# EAGLE board Board (EAGLE 9.7.0)
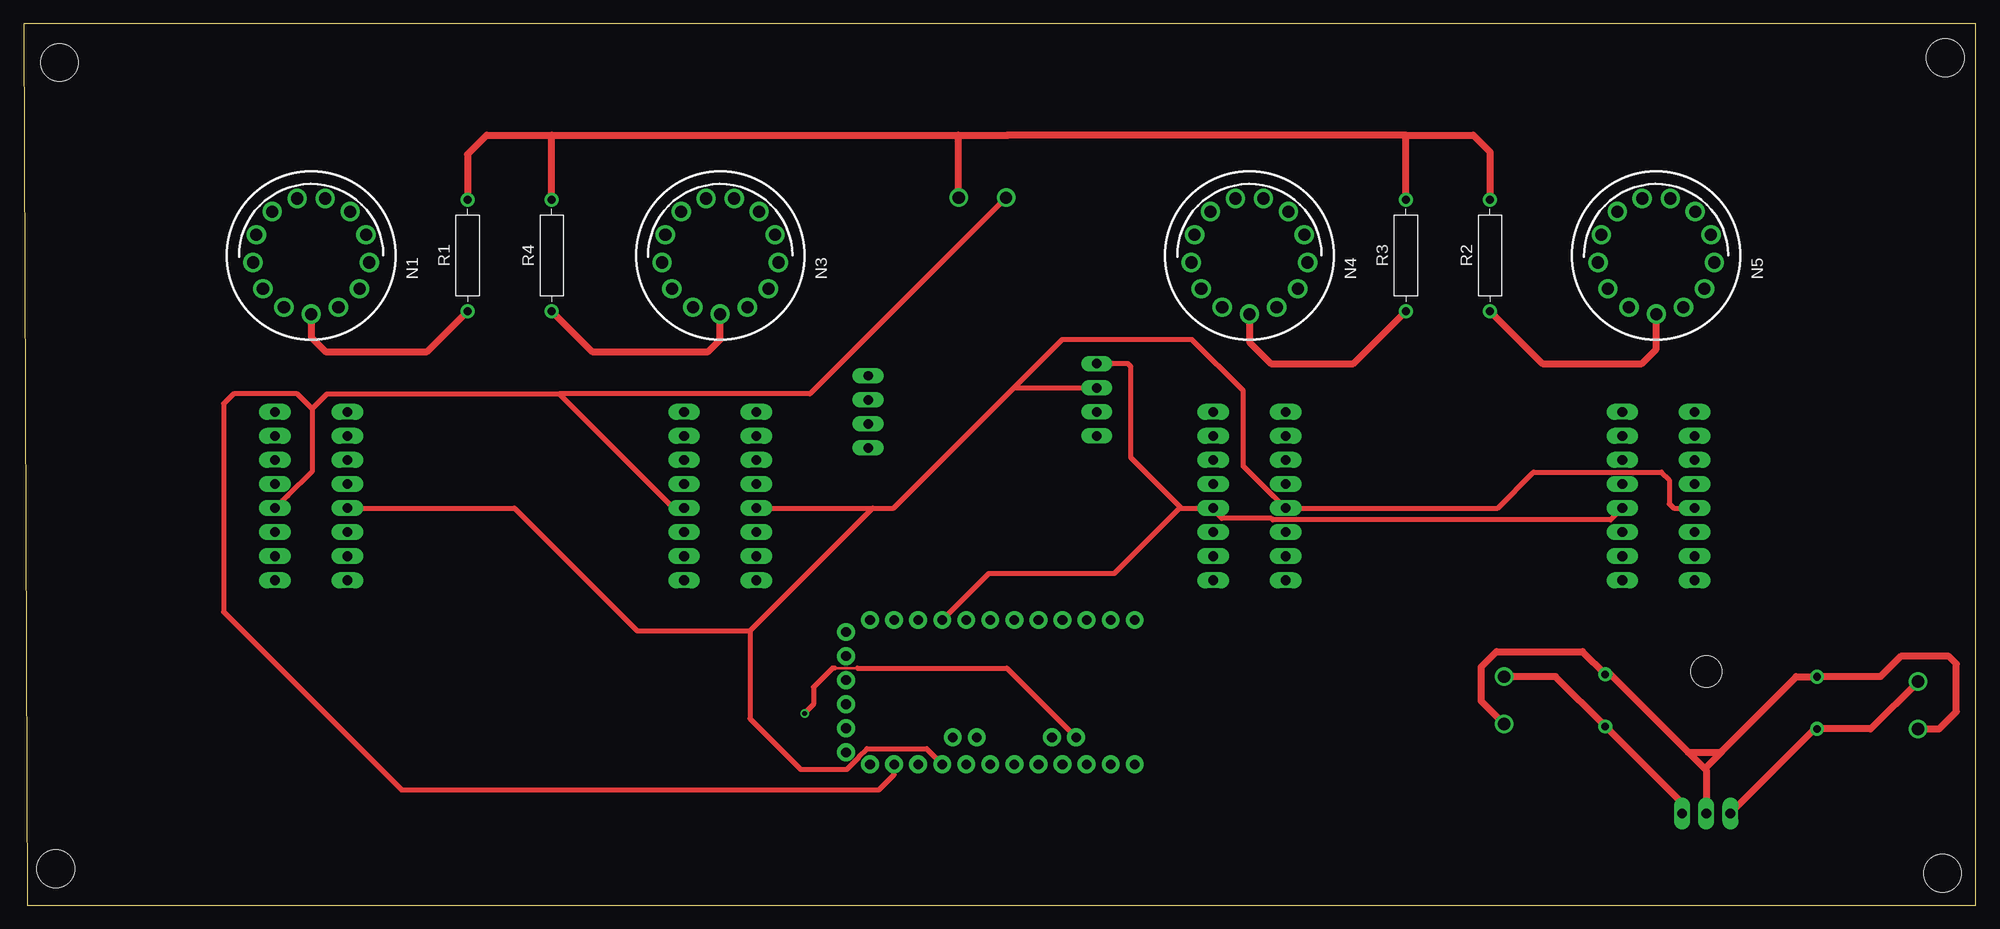
[diagram p0: board, top side]
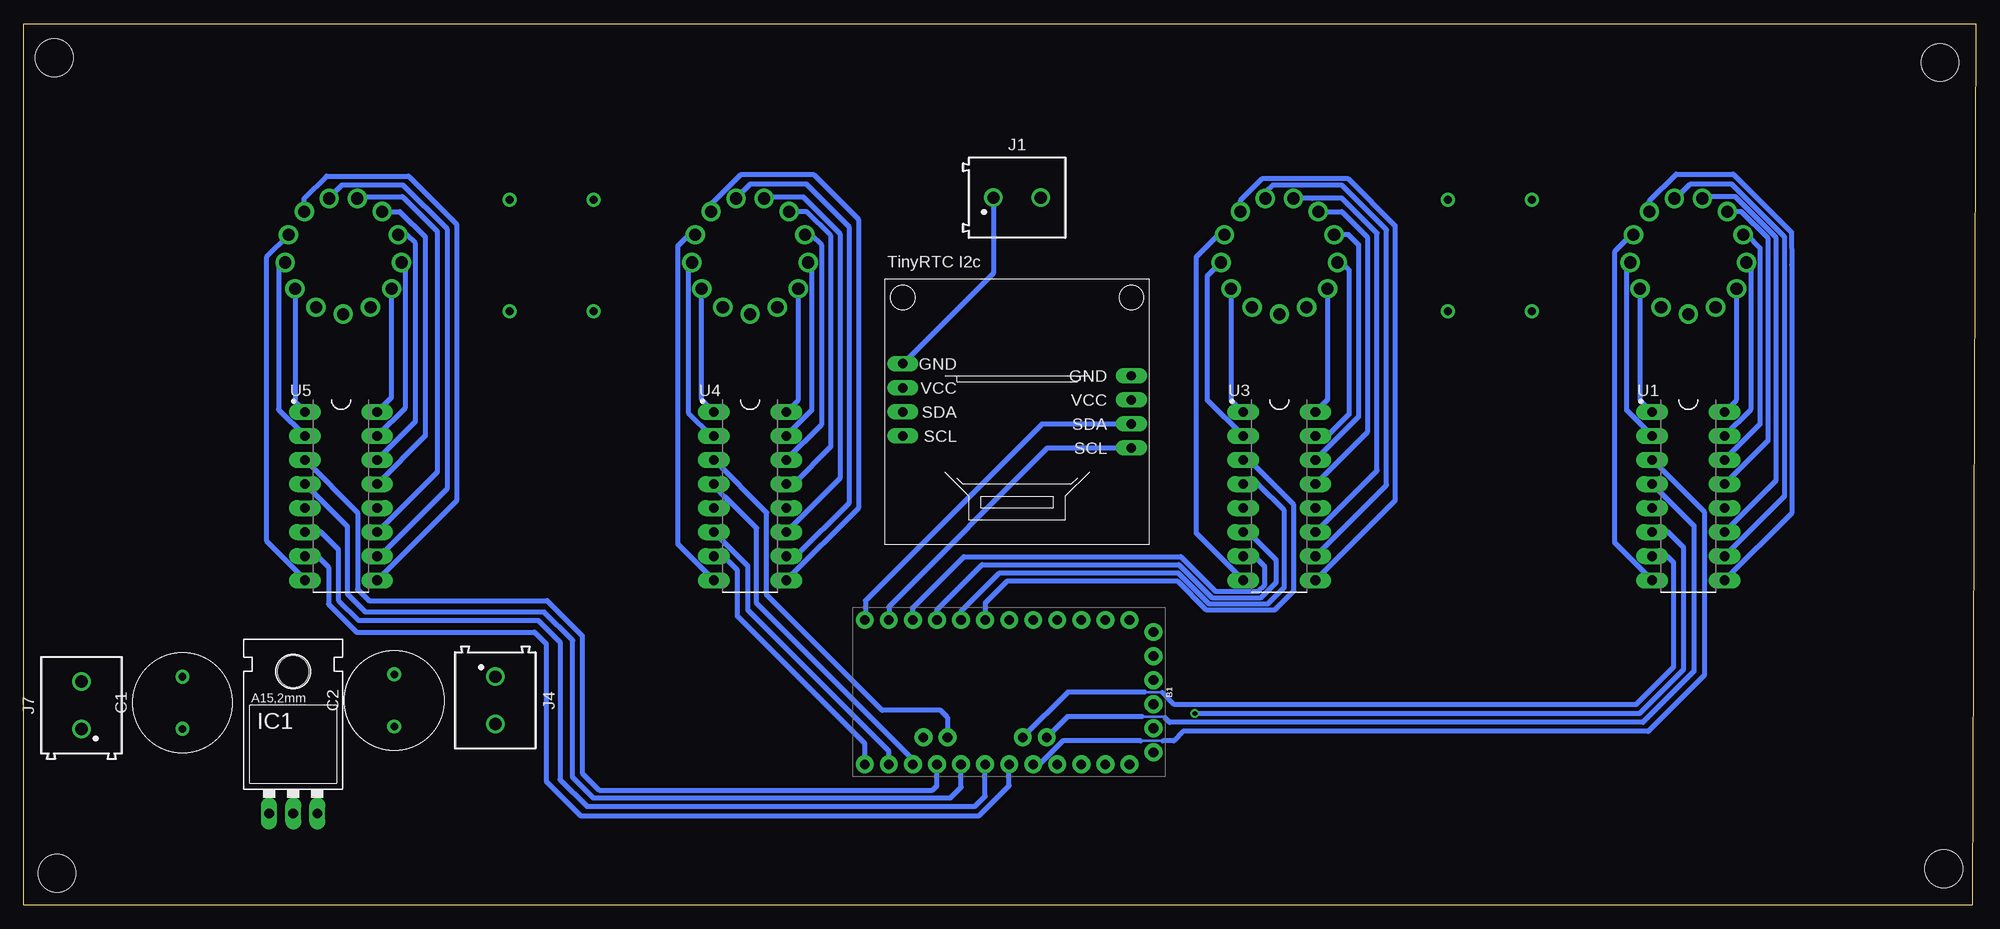
[diagram p1: board, bottom side, seen from below]

Size 206.1 x 93.04 mm. Coordinates in mm from the lower left corner, seen from the top.
Outline: 206.1,0 206.08,93.02 0,93.04 0.38,0 206.1,0
Copper layers (1*16): Top 0.035mm / dielectric 1.5mm / Bottom 0.035mm
Design rules "default *": minimum track width 6mil, minimum drill 0.5mm, track to track 6mil, track to pad 6mil, pad to pad 6mil, via to via 6mil, smd to smd 6mil, copper to edge 40mil, drill to drill 6mil, minimum pad ring 13mil, minimum via ring 8mil, stop-mask expansion 4mil, vias tented up to drill 0mil, thermal gap 10mil
Holes 4 mm at 202.87,89.43 3.78,88.95 3.38,3.84 202.58,3.36

## Footprints (pad centres in the part's own frame; a part is rotated, then mirrored left to right if it is on the bottom)
ARDUINO_PRO_MINI = drill 1.016 pad 1.88: 1 -7.62,12.7; 2 -7.62,10.16; 3 -7.62,7.62; 4 -7.62,5.08; 5 -7.62,2.54; 6 -7.62,0; 7 -7.62,-2.54; 8 -7.62,-5.08; 9 -7.62,-7.62; 10 -7.62,-10.16; 11 -7.62,-12.7; 12 -7.62,-15.24; 13 7.62,-15.24; 14 7.62,-12.7; 15 7.62,-10.16; 16 7.62,-7.62; 17 7.62,-5.08; 18 7.62,-2.54; 19 7.62,0; 20 7.62,2.54; 21 7.62,5.08; 22 7.62,7.62; 23 7.62,10.16; 24 7.62,12.7; A4 4.763,1.429; A5 4.763,3.969; A6 4.763,-9.049; A7 4.763,-6.509; BLK -6.35,15.24; GND -3.81,15.24; GRN 6.35,15.24; RXI 1.27,15.24; TXO 3.81,15.24; VCC -1.27,15.24
CAPRD550W60D1025H1250B = drill 0.8 pad 1.4: 1 -2.75,0; 2 2.75,0
78XXL = drill 1.016 long: GND 0,-3.81; IN -2.54,-3.81; OUT 2.54,-3.81 | hole 3.302: 0,11.176
691213710002 = drill 1.3: 1 -2.5,0; 2 2.5,0
IN-14 = drill 1.27 pad 2.032: 0 5.094,-3.516; 1 -5.094,-3.516; 2 -6.145,-0.746; 3 -5.788,2.195; 4 -4.105,4.633; 5 -1.481,6.01; 6 1.481,6.01; 7 4.105,4.633; 8 5.788,2.195; 9 6.145,-0.746; A 0,-6.19; LHDP 2.877,-5.481; RHDP -2.877,-5.481
RESAD1176W63L850D250B = drill 0.83 pad 1.43: 1 -5.88,0; 2 5.88,0
TINYRTC = drill 1 pad 1.575 long: 1 -12.065,2.54; 2 -12.065,0; 3 -12.065,-2.54; 4 -12.065,-5.08; 5 12.065,-6.35; 6 12.065,-3.81; 7 12.065,-1.27; 8 12.065,1.27
DIP762W46P254L2134H508Q16 = drill 1.016 long: 1 -3.81,8.89; 2 -3.81,6.35; 3 -3.81,3.81; 4 -3.81,1.27; 5 -3.81,-1.27; 6 -3.81,-3.81; 7 -3.81,-6.35; 8 -3.81,-8.89; 9 3.81,-8.89; 10 3.81,-6.35; 11 3.81,-3.81; 12 3.81,-1.27; 13 3.81,1.27; 14 3.81,3.81; 15 3.81,6.35; 16 3.81,8.89

## Placement (x,y rotation side)
B1  ARDUINO_PRO_MINI  [ARDUINO_PRO_MINI]  102.06,22.48 270 bottom
C1  [CAPRD550W60D1025H1250B]  189.33,21.36 90 bottom
C2  [CAPRD550W60D1025H1250B]  166.98,21.62 90 bottom
IC1  [78XXL]  177.65,13.49 0 bottom
J1  [691213710002]  101.22,74.68 0 bottom
J4  [691213710002]  156.31,21.62 270 bottom
J7  [691213710002]  200,21.11 90 bottom
N1  IN-14  [IN-14]  30.35,68.58 0 top
N3  IN-14  [IN-14]  73.53,68.58 0 top
N4  IN-14  [IN-14]  129.41,68.58 0 top
N5  IN-14  [IN-14]  172.36,68.58 0 top
R1  [RESAD1176W63L850D250B]  46.86,68.58 90 top
R2  [RESAD1176W63L850D250B]  154.81,68.58 90 top
R3  [RESAD1176W63L850D250B]  145.92,68.58 90 top
R4  [RESAD1176W63L850D250B]  55.75,68.58 90 top
T1  [TINYRTC]  101.22,50.8 180 bottom
U1  SN74141N  [DIP762W46P254L2134H508Q16]  30.35,43.18 0 bottom
U3  SN74141N  [DIP762W46P254L2134H508Q16]  73.53,43.18 0 bottom
U4  SN74141N  [DIP762W46P254L2134H508Q16]  129.41,43.18 0 bottom
U5  SN74141N  [DIP762W46P254L2134H508Q16]  172.59,43.18 0 bottom

## Library data of the parts
B1 = SparkFun-Boards
C1 C2 = Capacitor; CATEGORY: Capacitor
IC1 = tango
J1 J4 J7 = Wurth_Connectors_WR-TBL Rising Cage Clamp; DATASHEET-URL: https://www.we-online.com/catalog/datasheet/691213710002.pdf; IR-UL: 10A; IR-VDE: 10A; MOUNT: THT; PART-NUMBER: 691213710002; PINS: 2; PITCH: 5mm; TYPE: Horizontal; WIRE: 26 to 16 (AWG) 0.129 to 1.31 (mm²); WORKING-VOLTAGE-UL: 300V (AC); WORKING-VOLTAGE-VDE: 250V (AC)
N1 N3-N5 = russian-nixies
R1-R4 = Resistor; CATEGORY: Resistor; SUB-CATEGORY: Fixed
T1 = RTC
U1 U3-U5 = SN74141N; AVAILABILITY: Unavailable; MF: Texas Instruments; MP: SN74141N; PACKAGE: None; PRICE: None

## Nets
GND: T1.4
N$1: N1.1 U1.16
N$2: N1.2 U1.15
N$3: N1.3 U1.14
N$4: N1.4 U1.13
N$5: N1.5 U1.11
N$6: N1.6 U1.10
N$7: N1.0 U1.1
N$8: N1.9 U1.2
N$9: N1.7 U1.9
N$10: N1.8 U1.8
N$11: J1.2 R1.2 R2.2 R3.2 R4.2
N$12: N1.A R1.1
N$13: N3.A R4.1
N$15: B1.11 T1.1
N$16: B1.12 T1.2
N$17: B1.4 B1.23 J1.1 T1.5 U1.12 U3.12 U4.12 U5.12
N$18: B1.A5 U1.4
N$19: B1.10 U3.7
N$20: B1.A4 U1.7
N$21: B1.A6 U1.6
N$22: N3.1 U3.16
N$23: N3.2 U3.15
N$24: N3.3 U3.14
N$25: N3.4 U3.13
N$26: N3.5 U3.11
N$27: N3.6 U3.10
N$28: N3.0 U3.1
N$29: N3.9 U3.2
N$30: N3.7 U3.9
N$31: N3.8 U3.8
N$32: B1.15 U4.4
N$33: N4.A R3.1
N$34: N4.1 U4.16
N$35: N4.2 U4.15
N$36: N4.3 U4.14
N$37: N4.4 U4.13
N$38: N4.5 U4.11
N$39: N4.6 U4.10
N$40: N4.0 U4.1
N$41: N4.9 U4.2
N$44: C1.1 IC1.IN J7.2
N$45: C1.2 C2.2 IC1.GND J4.2 J7.1
N$46: C2.1 IC1.OUT J4.1
N$47: B1.9 U3.6
N$48: B1.8 U3.4
N$49: B1.7 U3.3
N$50: B1.21 T1.6 U1.5 U3.5 U4.5 U5.5
N$51: B1.13 U4.7
N$52: B1.14 U4.6
N$53: B1.A7 U4.3
N$54: B1.17 U5.4
N$55: B1.19 U5.7
N$56: B1.18 U5.6
N$57: B1.16 U5.3
N$58: B1.20 U1.3
N$61: N4.7 U4.9
N$62: N4.8 U4.8
N$68: N5.A R2.1
N$69: N5.1 U5.16
N$70: N5.2 U5.15
N$71: N5.3 U5.14
N$72: N5.4 U5.13
N$73: N5.5 U5.11
N$74: N5.6 U5.10
N$75: N5.0 U5.1
N$76: N5.9 U5.2
N$77: N5.7 U5.9
N$78: N5.8 U5.8
RAW: B1.24
VCC: T1.3

## Tracks (layer width: path | path; a pad name or v marks a point on that pad's centre or on a via)
N$1
  Bottom 0.508: U1.16 25.26,53.35 N1.1
N$2
  Bottom 0.508: N1.2 23.72,67.35 23.72,52.35 U1.15
N$3
  Bottom 0.508: N1.3 24.2,70.77 22.79,69.36 22.79,50.75 U1.14
N$4
  Bottom 0.508: N1.4 24.76,73.21 21.93,70.38 21.93,49.06 U1.13
N$5
  Bottom 0.508: N1.5 28.66,74.8 25.42,74.8 21.13,70.52 21.13,44.78 U1.11
N$6
  Bottom 0.508: N1.6 31.67,74.59 30.13,76.13 25.81,76.13 20.22,70.53 20.22,43.16 U1.10
N$7
  Bottom 0.508: U1.1 35.45,53.35 N1.0
N$8
  Bottom 0.508: U1.2 36.87,52.24 36.87,67.46 N1.9
N$9
  Bottom 0.508: N1.7 34.46,74.33 31.62,77.17 25.61,77.17 19.46,71.03 19.44,67.58 19.44,41.39 U1.9
N$10
  Bottom 0.508: U1.8 38.16,38.29 38.16,68.97 36.36,70.77 N1.8
N$11
  Top 0.508: 103.89,81.24 103.93,81.28
  Top 0.762: 145.92,81.28 103.93,81.28 | 55.75,81.28 98.68,81.28 | 55.75,81.28 48.89,81.28 46.86,79.25 R1.2 | R4.2 55.75,81.28 | 145.92,81.28 153.03,81.28 154.81,79.5 R2.2 | R3.2 145.92,81.28 | 98.68,81.28 103.85,81.28 103.89,81.24 | J1.2 98.72,74.83 98.68,74.87 98.68,81.28
N$12
  Top 0.762: R1.1 42.58,58.42 31.88,58.42 30.35,59.94 N1.A
N$13
  Top 0.762: R4.1 60.03,58.42 72.26,58.42 73.53,59.69 N3.A
N$15
  Bottom 0.508: B1.11 114.76,31.5 97.99,48.26 T1.1
N$16
  Bottom 0.508: B1.12 117.22,30.18 117.22,32.13 98.55,50.8 T1.2
N$17
  Top 0.508: U1.12 27.84,43.2 27.9,43.2 30.46,45.76 30.46,52.4 | 30.46,52.4 32.03,53.97 56.54,53.97 | U3.12 68.61,41.91 56.54,53.97 | T1.5 116.59,57.15 116.89,56.84 116.89,47.24 122.22,41.91 | B1.4 101.91,35.03 115.14,35.03 122.02,41.91 122.22,41.91 | 122.22,41.91 125.37,41.91 | 125.37,41.91 U4.12 | 30.46,52.4 28.88,53.97 22.15,53.97 21.11,52.93 21.11,30.96 39.9,12.17 90.3,12.17 91.9,13.77 B1.23 | U5.12 167.54,40.67 131.87,40.67 131.72,40.82 126.47,40.82 125.37,41.91 | J1.1 83.02,53.97 56.54,53.97
  Bottom 0.508: J1.1 103.72,66.72 T1.5
N$18
  Bottom 0.254: 85.6,19.79 85.7,19.89 88.01,19.89
  Bottom 0.508: U1.4 29.77,40.06 29.77,24.69 35.15,19.3 85.12,19.3 85.6,19.79 | 88.01,19.89 95.92,19.89 B1.A5
N$19
  Bottom 0.508: U3.7 76.15,36.83 75.06,35.74 75.06,33.83 75.77,33.12 80.27,33.12 83.92,36.78 106.83,36.78 112.22,31.39 B1.10
N$20
  Bottom 0.254: 85.88,22.45 85.9,22.48 87.3,22.48 | 87.3,22.48 87.76,22.48 | 87.3,22.48
  Bottom 0.508: U1.7 32.59,36.83 31.93,36.17 31.93,25.12 35.89,21.16 84.58,21.16 85.88,22.45 | 87.76,22.48 95.87,22.48 B1.A4
N$21  (via drill 0.5)
  Top 0.254: 85.62,25.02 87.99,25.02 88.14,25.02 88.19,25.07
  Top 0.508: 87.99,25.02 103.8,25.02 B1.A6 | v82.45,20.24 83.39,21.18 83.39,23.01 85.4,25.02 85.62,25.02
  Bottom 0.508: v82.45,20.24 82.42,20.22 35.51,20.22 30.86,24.87 30.86,37.77 32.46,39.37 U1.6
N$22
  Bottom 0.508: U3.16 68.44,53.35 N3.1
N$23
  Bottom 0.508: N3.2 67.29,67.73 66.88,67.73 66.18,67.03 66.18,51.8 68.56,49.43 69.62,49.43 U3.15
N$24
  Bottom 0.508: U3.14 65.18,51.54 65.18,69.72 66.23,70.77 N3.3
N$25
  Bottom 0.508: N3.4 66.93,73.21 64.24,70.52 64.24,49.94 U3.13
N$26
  Bottom 0.508: U3.11 63.22,45.87 63.22,70.92 66.93,74.64 70.02,74.64 70.06,74.59 N3.5
N$27
  Bottom 0.508: U3.10 62.2,44.35 62.2,71.27 66.94,76.01 74.23,76.01 75.01,75.23 N3.6
N$28
  Bottom 0.508: U3.1 78.63,53.35 N3.0
N$29
  Bottom 0.508: N3.9 81.16,66.36 81.16,53.34 U3.2
N$30
  Bottom 0.508: N3.7 77.64,74.38 75.31,76.71 66.29,76.71 61.32,71.73 61.32,42.7 U3.9
N$31
  Bottom 0.508: U3.8 82.31,39.25 82.31,68.43 79.97,70.77 N3.8
N$32
  Bottom 0.508: B1.15 112.22,15.37 128.7,31.85 128.7,39.8 131.98,43.08 132.1,43.08 133.22,44.2 U4.4
N$33
  Top 0.762: R3.1 140.37,57.15 131.7,57.15 129.41,59.44 N4.A
N$34
  Bottom 0.508: U4.16 124.32,53.35 N4.1
N$35
  Bottom 0.508: N4.2 122.9,67.46 122.9,52.24 U4.15
N$36
  Bottom 0.508: N4.3 122.97,70.77 121.83,69.63 121.83,50.76 U4.14
N$37
  Bottom 0.508: N4.4 123.46,73.21 120.88,70.63 120.88,48.41 124.84,44.45 U4.13
N$38
  Bottom 0.508: N4.5 127.77,74.75 123.81,74.75 119.91,70.85 119.91,45.06 U4.11
N$39
  Bottom 0.508: N4.6 129.36,76.12 123.5,76.12 118.97,71.6 118.97,42.44 124.59,36.83 U4.10
N$40
  Bottom 0.508: U4.1 134.51,53.35 N4.0
N$41
  Bottom 0.508: U4.2 133.48,49.53 135.93,51.98 135.93,67.46 N4.9
N$44
  Top 0.762: IC1.IN 189.12,18.61 C1.1 195,18.61 J7.2
N$45
  Top 0.762: 177.65,14.23 IC1.GND | 179.25,16.21 179.17,16.14 175.74,16.14 | 179.25,16.21 187.15,24.11 C1.2 196.04,24.11 198.19,26.26 203.25,26.26 204.05,25.47 204.05,20.43 202.22,18.61 J7.1 | 177.65,14.23 175.74,16.14 | 175.74,16.14 167.51,24.36 C2.2 164.57,26.77 155.51,26.77 153.88,25.15 153.88,21.54 J4.2 | 179.25,16.21 179.3,16.21 177.65,14.56 177.65,14.23
N$46
  Top 0.762: J4.1 161.73,24.11 C2.1 175.11,10.74 IC1.OUT
N$47
  Bottom 0.508: B1.9 109.68,31.17 104.9,35.94 84.15,35.94 80.67,32.46 75.47,32.46 73.86,34.07 73.86,36.42 76.81,39.37 U3.6
N$48
  Bottom 0.508: U3.4 75.77,44.45 73,41.68 73,33.54 74.74,31.8 80.94,31.8 84.22,35.08 103.07,35.08 107.14,31.01 B1.8
N$49
  Bottom 0.508: U3.3 76.73,46.99 72.06,42.32 72.06,33.12 74.04,31.14 81.21,31.14 84.26,34.19 102.29,34.19 104.6,31.88 B1.7
N$50
  Top 0.508: U1.5 51.82,41.91 64.77,28.96 76.68,28.96 | 76.68,28.96 89.64,41.91 | U3.5 89.64,41.91 | 104.55,54.61 91.85,41.91 89.64,41.91 | 104.55,54.61 T1.6 | 104.55,54.61 109.63,59.69 123.37,59.69 128.75,54.3 128.75,46.32 131.87,43.2 131.93,43.2 U4.5 155.63,41.91 159.41,45.69 172.92,45.69 173.74,44.88 173.74,42.37 174.19,41.91 U5.5 | B1.21 95.33,16.51 89.03,16.51 88.16,15.65 88.16,15.57 86.92,14.33 82.04,14.33 76.68,19.68 76.68,28.96
N$51
  Bottom 0.508: U4.7 132.21,36.83 130.73,35.36 130.73,30.48 117.3,17.04 B1.13
N$52
  Bottom 0.508: U4.6 129.64,35.79 129.64,31.14 114.76,16.26 B1.14
N$53
  Bottom 0.508: U4.3 127.66,41.43 127.66,32.74 115.47,20.55 109.3,20.55 108.57,19.82 B1.A7
N$54
  Bottom 0.508: B1.17 107.14,12.45 108.28,11.3 145.95,11.3 148.13,13.49 148.13,27.94 151.13,30.94 170,30.94 171.91,32.84 171.91,39.95 U5.4
N$55
  Bottom 0.508: B1.19 102.06,12.62 105.23,9.45 147.32,9.45 150.93,13.06 150.93,27.58 152.17,28.83 170.97,28.83 173.91,31.78 173.91,35.66 175.08,36.83 U5.7
N$56
  Bottom 0.508: U5.6 174.8,39.37 174.75,39.42 172.87,37.54 172.87,32.21 170.71,30.05 151.76,30.05 149.48,27.76 149.48,13.26 146.63,10.41 105.66,10.41 104.6,11.48 B1.18
N$57
  Bottom 0.508: U5.3 170.84,41.43 170.84,33.33 169.65,32.13 150.82,32.13 147.14,28.45 147.14,13.94 145.34,12.14 110.13,12.14 109.68,12.6 B1.16
N$58
  Bottom 0.254: 85.83,17.35 88.16,17.35
  Bottom 0.508: U1.3 28.68,41.5 28.68,24.26 34.59,18.34 83.69,18.34 84.68,17.35 85.83,17.35 | 88.16,17.35 96.39,17.35 98.88,14.86 B1.20
N$61
  Bottom 0.508: U4.9 117.98,41.91 117.98,72.39 122.73,77.14 130.36,77.14 133.52,73.98 N4.7
N$62
  Bottom 0.508: U4.8 137.06,38.12 137.06,69.57 135.85,70.77 N4.8
N$68
  Top 0.762: R2.1 160.36,57.15 170.81,57.15 172.36,58.7 N5.A
N$69
  Bottom 0.508: U5.16 167.26,53.59 N5.1
N$70
  Bottom 0.508: N5.2 165.84,67.46 165.84,52.47 U5.15
N$71
  Bottom 0.508: U5.14 164.72,51.05 164.72,69.85 165.64,70.77 N5.3
N$72
  Bottom 0.508: N5.4 166.39,73.21 163.7,70.53 163.7,49.53 U5.13
N$73
  Bottom 0.508: U5.11 162.43,45.72 162.43,71.12 166.11,74.79 170.67,74.79 N5.5
N$74
  Bottom 0.508: N5.6 173.42,75.01 173.42,75.1 172.49,76.03 166.07,76.03 161.42,71.37 161.42,43.94 168.53,36.83 U5.10
N$75
  Bottom 0.508: U5.1 177.45,53.12 N5.0
N$76
  Bottom 0.508: U5.2 179.18,52.31 179.18,67.41 178.76,67.83 N5.9
N$77
  Bottom 0.508: U5.9 160.4,42.67 160.4,71.88 165.48,76.96 174.12,76.96 176.46,74.62 N5.7
N$78
  Bottom 0.508: U5.8 176.37,34.33 176.37,34.34 180.5,38.47 180.5,68.38 178.15,70.73 N5.8